# Altium PCB CV2018-DIFF.PcbDoc
Units mil, origin at the board's own origin, x right, y up, seen from the top; angles counter-clockwise.
Board outline 6299 x 3937 mil, 2 copper layers (TopLayer, BottomLayer); 27 components, 51 nets, 206 pads, 33 vias.
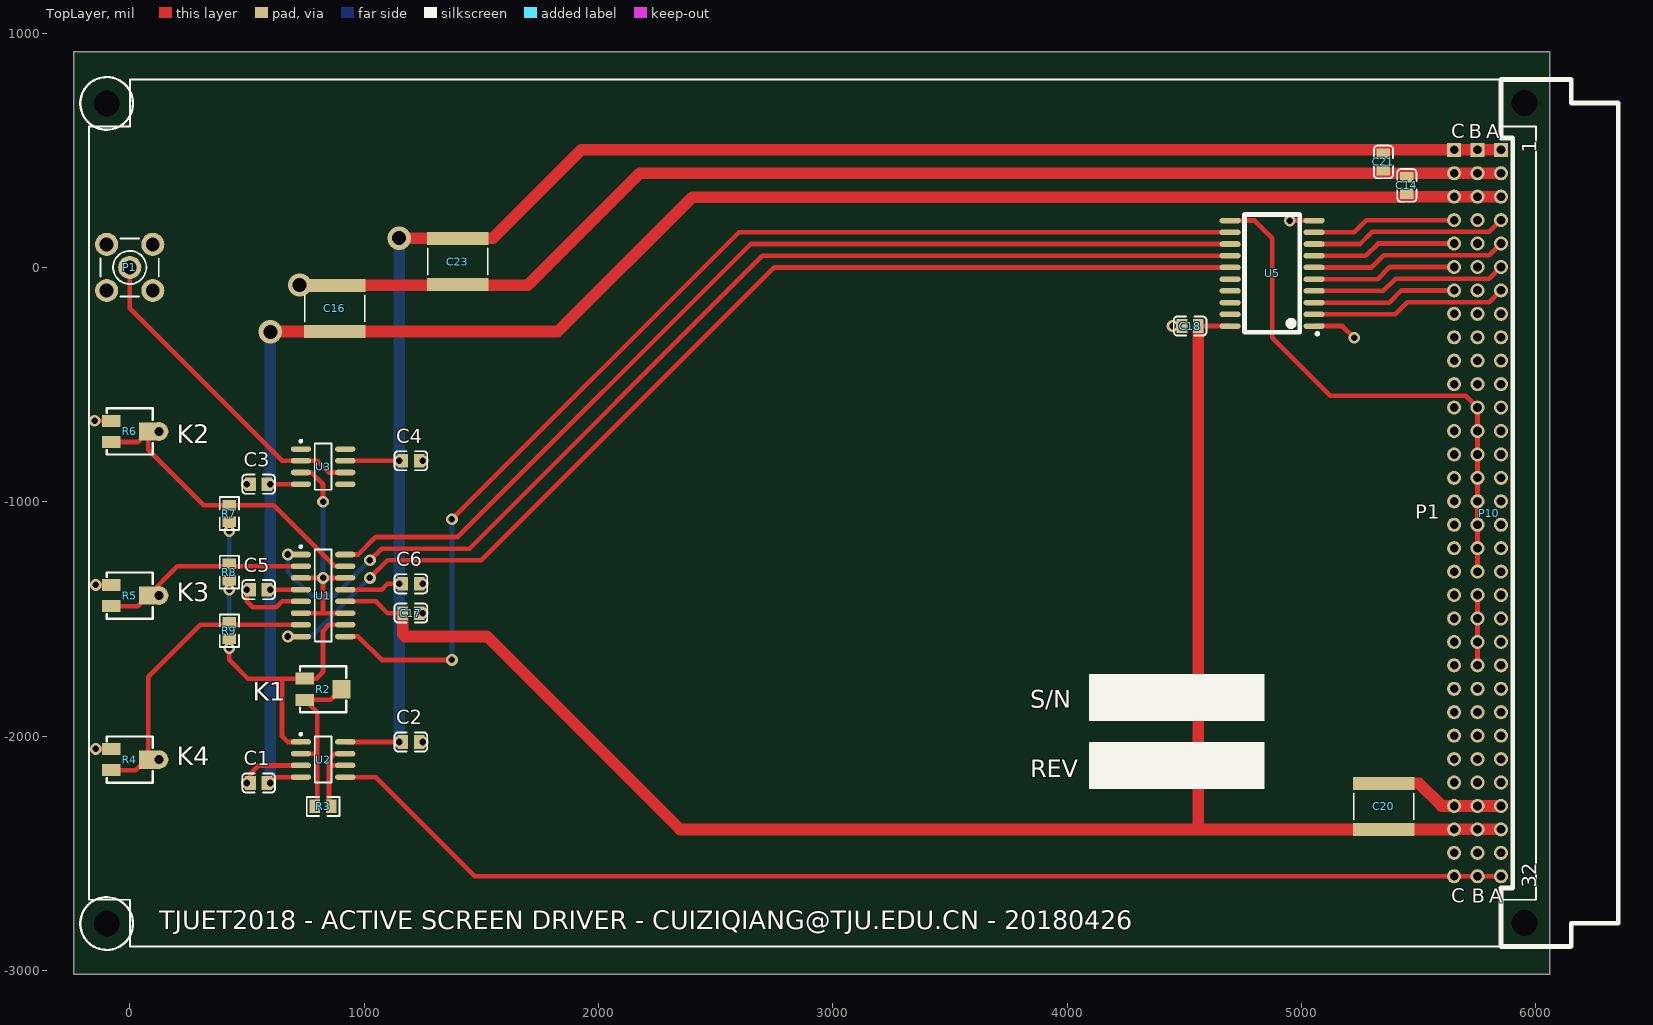
[diagram p0: TopLayer view]
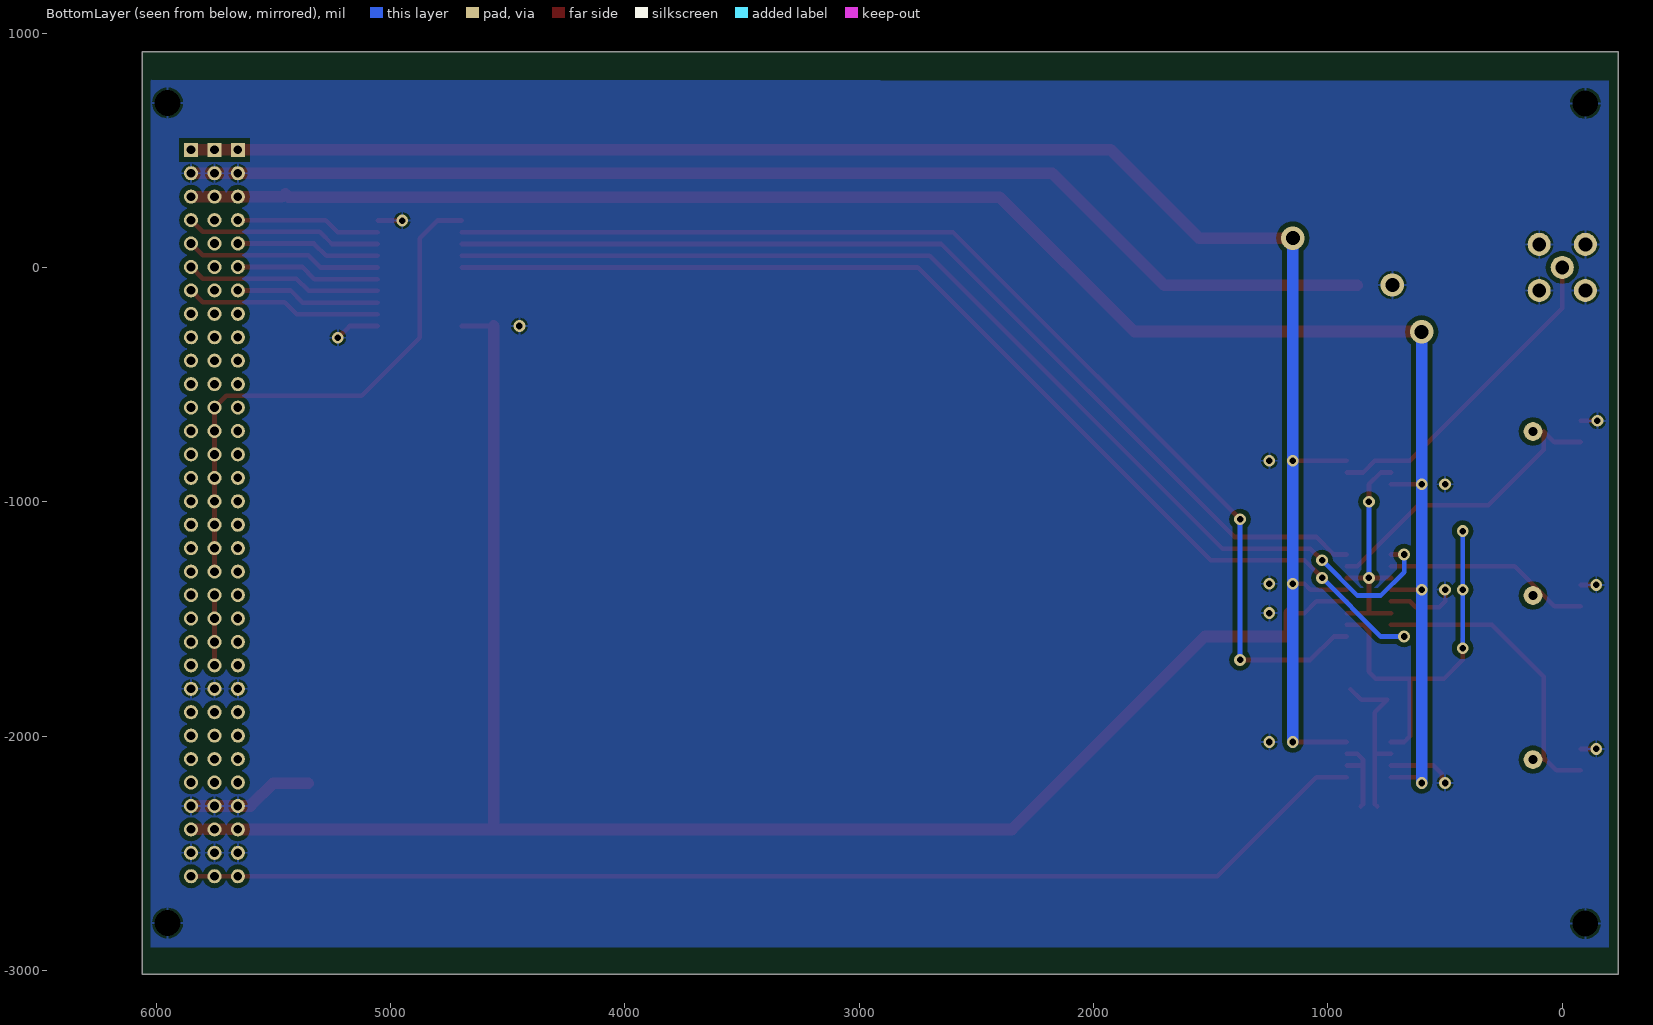
[diagram p1: BottomLayer view, seen from below]
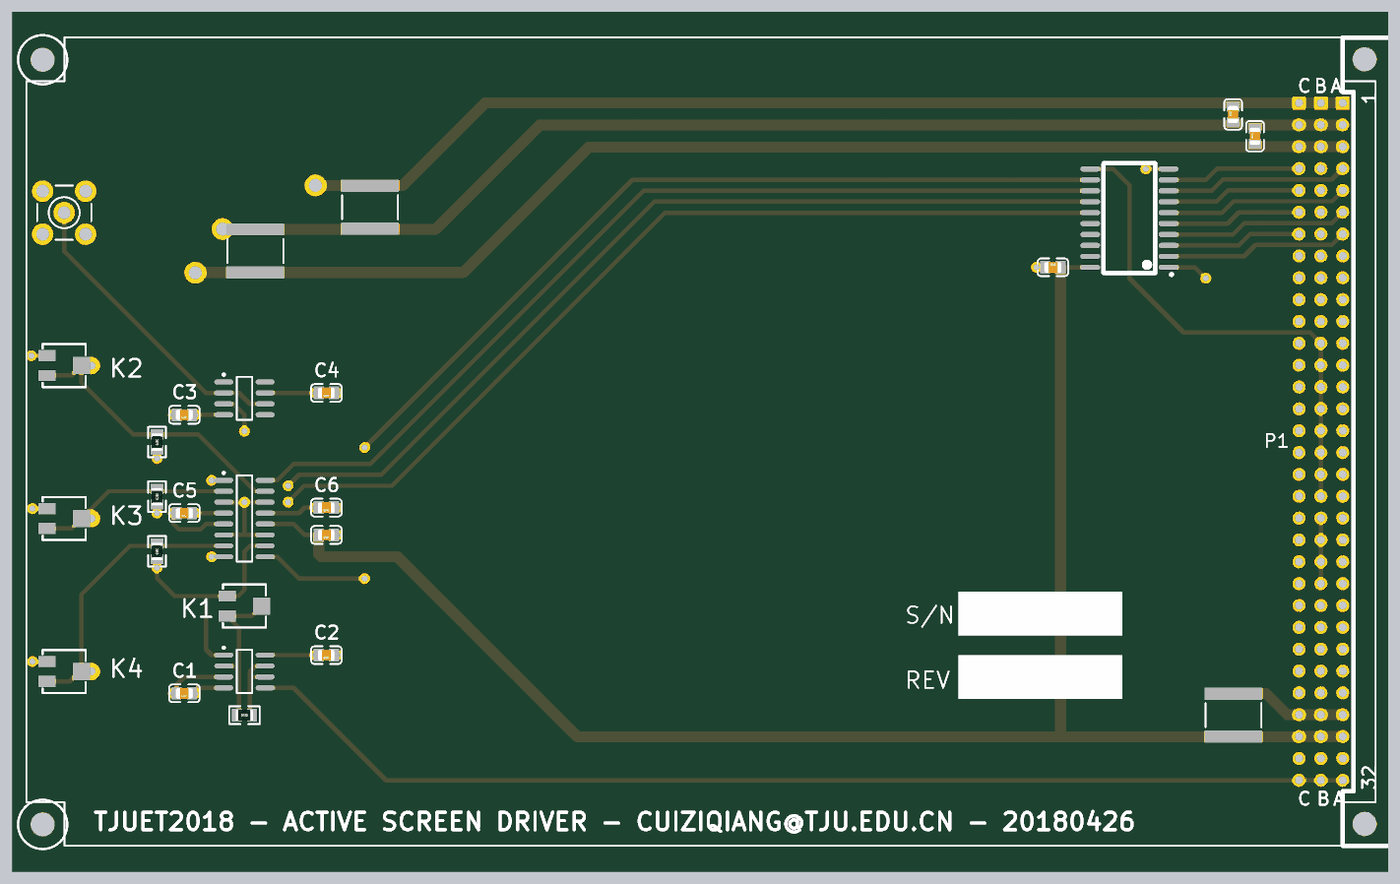
[diagram p2: 3D render of the assembled board from above, using the file's embedded part models]

## Layer stack, top to bottom
TopLayer: signal copper 1.4
Dielectric: core 12.6, FR-4, Dk 4.8
BottomLayer: signal copper 1.4

## Board outline
-238.43,-3017 6060.57,-3017 6060.57,920 -238.43,920

## Design rules (kind name [scope] priority, off if disabled: settings)
Clearance [All] p1: gap=10
FabricationTestPointUsage TestPointUsage [All] p1: valid=0 allowmultiple=FALSE
FabricationTestpoint Testpoint [All] p1: side=3 testpointundercomponent=TRUE minsize=40 maxsize=100 preferedsize=60 minholesize=20 maxholesize=40 preferedholesize=32 testpointgrid=1 allowsidetop=TRUE allowsidebottom=TRUE usegrid=TRUE gridtolerance=0.01
PlaneClearance [All] p1: clearance=10
PolygonConnect [All] p1: connectstyle=Relief reliefconductorwidth=10 reliefentries=4 polygonreliefangle="90 Angle" airgapwidth=10
RoutingVias [All] p1: holewidth=28 width=50 viastyle="Through Hole" minholewidth=28 minwidth=50 maxholewidth=28 maxwidth=50
SilkToSolderMaskClearance SilkscreenOverComponentPads [IsPad] p1: minsilkscreentomaskgap=10 clearancetoexposedcopper=TRUE
SolderMaskExpansion [All] p1: expansion=2
Width [All] p1: maxlimit=100 minlimit=10 preferedwidth=20
24 further rules are at their usual default settings.

## Components (designator, comment, footprint, x,y, rotation, side; value= is the part's Value field where it differs from the comment)
C1 "100nF(104) 10% 50V" LC-0805_C 550,-2200 r180 top
C2 "100nF(104) 10% 50V" LC-0805_C 1200,-2025 r180 top
C3 "100nF(104) 10% 50V" LC-0805_C 550,-925 r180 top
C4 "100nF(104) 10% 50V" LC-0805_C 1200,-825 r180 top
C5 "100nF(104) 10% 50V" LC-0805_C 550,-1375 r180 top
C6 "100nF(104) 10% 50V" LC-0805_C 1200,-1350 r180 top
C14 "100nF(104) 10% 50V" LC-0805_C 5450,350 r90 top
C16 "Cap Pol3" C2225 875,-175 r270 top
C17 "100nF(104) 10% 50V" LC-0805_C 1200,-1475 r180 top
C18 "100nF(104) 10% 50V" LC-0805_C 4525,-250 r0 top
C20 "Cap Pol3" C2225 5351.57,-2300 r90 top
C21 "100nF(104) 10% 50V" LC-0805_C 5350,450 r90 top
C23 "Cap Pol3" C2225 1400,25 r270 top
P1 "SMB" SMB_V-RJ45 0,0 r0 top locked
P10 "CNVME96" CNVME96 5851.57,502 r90 top locked
R2 "2K" POT4MM-2 825,-1800 r0 top
R3 "4.99KΩ (4991) ±1%" LC-0805_R 825,-2300 r0 top
R4 "2K" POT4MM-2 0,-2100 r0 top
R5 "2K" POT4MM-2 0,-1400 r0 top
R6 "2K" POT4MM-2 0,-700 r0 top
R7 "4.99KΩ (4991) ±1%" LC-0805_R 425,-1050 r270 top
R8 "4.99KΩ (4991) ±1%" LC-0805_R 425,-1300 r270 top
R9 "4.99KΩ (4991) ±1%" LC-0805_R 425,-1550 r270 top
U1 "DG412CY" NSO16_N 825,-1400 r0 top
U2 "AD8066ARZ" ADI-R-8_N 825,-2100 r0 top
U3 "AD817ARZ" ADI-R-8_N 825,-850 r0 top
U5 "74HC574D" LC-SOIC-20_300mil 4875,-25 r90 top

## Footprints (in the part's own frame and the unit in brackets; to place one, negate y for a bottom-side part, rotate by r counter-clockwise, add the part's x,y. Pads: shape width x height; smd on the part's side, far side on the other; paste and mask are expansions set on the pad)
ADI-R-8_N [mm] "SOIC, 8-Leads, Body 4.9x3.9mm, Pitch 1.27mm, IPC Medium Density"
  oval 2.2x0.6 smd: 1(-2.4,1.905) 2(-2.4,0.635) 3(-2.4,-0.635) 4(-2.4,-1.905) 5(2.4,-1.905) 6(2.4,-0.635) 7(2.4,0.635) 8(2.4,1.905)
  silkscreen extent -2.52,-2.5 0.9,2.88, body extent -2,-2.5 2,2.5, height 1.75
C2225 [mm] "Chip Capacitor, Body 5.7x6.4mm, IPC High Density"
  rect 1.4x6.7 smd: 1(-2.5,0) 2(2.5,0)
  silkscreen extent -1.4,-3.25 1.4,3.25, body extent -2.95,-3.4 2.95,3.4, height 1.4
CNVME96 [mil]
  round 50 hole 110: 97(200,-100) 98(-3300,-100)
  rect 60x60 / inner round 60 / far side rect 60x60 hole 37: A1(0,0) B1(0,100) C1(0,200)
  round 60 hole 37: A2(-100,0) A3(-200,0) A4(-300,0) A5(-400,0) A6(-500,0) A7(-600,0) A8(-700,0) A9(-800,0) A10(-900,0) A11(-1000,0) A12(-1100,0) A13(-1200,0) A14(-1300,0) A15(-1400,0) A16(-1500,0) A17(-1600,0) A18(-1700,0) A19(-1800,0) A20(-1900,0) A21(-2000,0) A22(-2100,0) A23(-2200,0) A24(-2300,0) A25(-2400,0) A26(-2500,0) A27(-2600,0) A28(-2700,0) A29(-2800,0) A30(-2900,0) A31(-3000,0) A32(-3100,0) B2(-100,100) B3(-200,100) B4(-300,100) B5(-400,100) B6(-500,100) B7(-600,100) B8(-700,100) B9(-800,100) B10(-900,100) B11(-1000,100) B12(-1100,100) B13(-1200,100) B14(-1300,100) B15(-1400,100) B16(-1500,100) B17(-1600,100) B18(-1700,100) B19(-1800,100) B20(-1900,100) B21(-2000,100) B22(-2100,100) B23(-2200,100) B24(-2300,100) B25(-2400,100) B26(-2500,100) B27(-2600,100) B28(-2700,100) B29(-2800,100) B30(-2900,100) B31(-3000,100) B32(-3100,100) C2(-100,200) C3(-200,200) C4(-300,200) C5(-400,200) C6(-500,200) C7(-600,200) C8(-700,200) C9(-800,200) C10(-900,200) C11(-1000,200) C12(-1100,200) C13(-1200,200) C14(-1300,200) C15(-1400,200) C16(-1500,200) C17(-1600,200) C18(-1700,200) C19(-1800,200) C20(-1900,200) C21(-2000,200) C22(-2100,200) C23(-2200,200) C24(-2300,200) C25(-2400,200) C26(-2500,200) C27(-2600,200) C28(-2700,200) C29(-2800,200) C30(-2900,200) C31(-3000,200) C32(-3100,200)
  silkscreen extent -3400,-500 300,0
LC-0805_C [mm]
  rect 1.16x1.47 smd: 1(-0.89,0) 2(0.89,0)
  silkscreen extent -1.77,-1.04 1.77,1.04, body extent -1,-0.62 1,0.63, height 0.77
LC-0805_R [mm]
  rect 1.16x1.47 smd: 1(-0.89,0) 2(0.89,0)
  silkscreen extent -1.77,-1.04 1.77,1.04, body extent -1,-0.62 1,0.63, height 0.49
LC-SOIC-20_300mil [mm]
  oval 0.6x2.3 smd: 1(-5.715,-4.55) 2(-4.445,-4.55) 3(-3.175,-4.55) 4(-1.905,-4.55) 5(-0.635,-4.55) 6(0.635,-4.55) 7(1.905,-4.55) 8(3.175,-4.55) 9(4.445,-4.55) 10(5.715,-4.55) 11(5.715,4.55) 12(4.445,4.55) 13(3.175,4.55) 14(1.905,4.55) 15(0.635,4.55) 16(-0.635,4.55) 17(-1.905,4.55) 18(-3.175,4.55) 19(-4.445,4.55) 20(-5.715,4.55)
  silkscreen extent -6.7,-5.05 6.38,3
NSO16_N [mm] "SOIC, 16-Leads, Body 9.9x3.9mm, Pitch 1.27mm, IPC Medium Density"
  oval 2.2x0.6 smd: 1(-2.4,4.445) 2(-2.4,3.175) 3(-2.4,1.905) 4(-2.4,0.635) 5(-2.4,-0.635) 6(-2.4,-1.905) 7(-2.4,-3.175) 8(-2.4,-4.445) 9(2.4,-4.445) 10(2.4,-3.175) 11(2.4,-1.905) 12(2.4,-0.635) 13(2.4,0.635) 14(2.4,1.905) 15(2.4,3.175) 16(2.4,4.445)
  silkscreen extent -2.52,-5 0.9,5.42, body extent -2,-5 2,5, height 1.75
POT4MM-2 [mm] "Square Trimming Potentiometer"
  rect 2x1.3 smd: CCW(-2,-1.15) CW(-2,1.15)
  rect 2x2 smd: W(2,0)
  silkscreen extent -2.5,-2.5 2.5,2.5
SMB_V-RJ45 [mm] "Connector; SMB Straight"
  round 2.5 hole 1.5: 1(0,0) 2(-2.5,-2.5) 2(-2.5,2.5) 2(2.5,-2.5) 2(2.5,2.5)
  silkscreen extent -3.15,-3.15 3.15,3.15

## Part data
C1 C2 C3 C4 C5 C6 C14 C17 C18 C21: library part "0805 100nF(104) 10% 50V", "贴片电容"
C16 C20 C23: "Polarized Capacitor (Surface Mount)"
P1: "SMB Straight Connector"
P10: "96-Pin Connector (3x32 2.54mm grid)"
R2 R4 R5 R6: library part "RPot SM", "Square Trimming Potentiometer"
R3 R7 R8 R9: library part "0805 4.99KΩ (4991) 1%", "贴片电阻"
U1: "Improved, Quad, SPST Analog Switches"
U2: "Double Channel Low Power Operational Amplifier, 145 MHz BW, 180 V/us SR, Industrial, 8-pin SOIC (R-8), Tube"
U3: "Single Channel Low Power Operational Amplifier, 50 MHz BW, 350 V/us SR, Industrial, 8-pin SOIC (R-8), Tube"
U5: library part 74HC573D, "74系列逻辑芯片"

## Free pads (board coordinates)
  round 80 hole 37: 0(125,-2100) 0(125,-1400) 0(125,-700)
  round 50 hole 110: 1(-98.43,700) 2(-98.43,-2800)

## Via types
v1: diameter 50, hole 28, TopLayer to BottomLayer, 30 vias
v2: diameter 100, hole 60, TopLayer to BottomLayer, 3 vias

## Nets (pads, with @x,y where several pads share a name; then routed paths per layer and width w, separated by ;. In a path a pad name is that pad's centre, name@x,y a point inside that pad or via, vN(x,y) a via of type N, cw(c..) or ccw(c..) an arc to the next point about the centre after c; other vN are vias at no path point)
+5V: C17.2 C18.2 C20.1 P10.A30 P10.B30 P10.C30 U1.12 U5.20 | length 7657.5
  TopLayer w20: U1.12 1050,-1425 1100,-1475 C17.2 ; C18.2 U5.20 ; P10.C30@5651.15,-2398.43 P10.C30
  TopLayer w50: C17.2 1164.96,-1564.96 1175,-1575 1525,-1575 2348.43,-2398.43 C20.1 P10.C30@5651.15,-2398.43 ; 4560.04,-2383.46 C18.2 ; P10.C30 P10.B30 P10.A30
+12V: C2.2 C4.2 C6.2 C21.2 C23.1 P10.A1 P10.B1 P10.C1 U1.13 U2.8 U3.7 | length 7754.5
  TopLayer w20: U2.8 C2.2 ; U1.13 1075,-1375 1100,-1350 C6.2 ; U3.7 C4.2
  TopLayer w50: v2(1150,125) 1550,125 1927,502 P10.C1 P10.B1 P10.A1
  BottomLayer w50: v1(1150,-2025) v2(1150,125)
  other v1: 1150,-1350 1150,-825
-12V: C1.1 C3.1 C5.1 C14.1 C16.2 P10.A3 P10.B3 P10.C3 U1.4 U2.4 U3.4 | length 7854.8
  TopLayer w20: C1.1 610.04,-2175 U2.4 ; C5.1 U1.4 ; C3.1 U3.4
  TopLayer w50: v2(600,-275) 601.57,-273.43 C16.2 1826.57,-273.43 2400,300 5435.04,300 C14.1 ; C14.1@5462.96,302 P10.C3 P10.B3 P10.A3
  BottomLayer w50: v1(600,-2200) v2(600,-275)
  other v1: 600,-1375 600,-925
A0: P10.C12
A1: P10.A12
A2: P10.C13
A3: P10.A13
A4: P10.C14
A5: P10.A14
A6: P10.C15
A7: P10.A15
A8: P10.C16
A9: P10.A16
A10: P10.C17
A11: P10.A17
A12: P10.C18
A13: P10.A18
A14: P10.C19
A15: P10.A19
AGND: C1.2 C2.1 C3.2 C4.1 C5.2 C6.1 C14.2 C16.1 C17.1 C18.1 C20.2 C21.1 C23.2 P1.2 P10.97 P10.98 P10.A2 P10.A24 P10.A29 P10.A31 P10.B2 P10.B24 P10.B29 P10.B31 P10.C2 P10.C24 P10.C29 P10.C31 pad.1 pad.2 R4.CW R5.CW R6.CW U1.5 U2.3 U5.1 U5.10 | length 6786
  TopLayer w20: v1(-150,-654.72) R6.CW ; v1(-145.28,-2054.72) R4.CW ; v1(-145.28,-1354.72) R5.CW ; v1(500,-1375) 500,-1425 525,-1450 625,-1450 650,-1425 U1.5 ; C1.2 514.96,-2160.04 550,-2125 U2.3 ; v1(4950,200) U5.10 ; U5.1 5175,-250 v1(5225,-300)
  TopLayer w50: C16.1 1698.43,-76.57 2177,402 P10.C2 P10.B2 P10.A2 ; C20.2 5501.58,-2201.58 5598,-2298 P10.C29 P10.B29 P10.A29
  other v1: 500,-2200 1250,-2025 1250,-1475 1250,-1350 500,-925 1250,-825 4450,-250
  other v2: 725,-75
CLK: P10.B12 P10.B13 P10.B14 P10.B15 P10.B16 P10.B17 P10.B18 P10.B19 U5.11 | length 2335.2
  TopLayer w20: U5.11 4800,200 4875,125 4875,-300 5123,-548 5701.57,-548 P10.B12 P10.B13 P10.B14 P10.B15 P10.B16 P10.B17 P10.B18 P10.B19
D0: P10.C4 U5.9 | length 619
  TopLayer w20: U5.9 5225,150 5277,202 P10.C4
D1: P10.A4 U5.8 | length 839.7
  TopLayer w20: U5.8 5250,100 5302,152 5801.57,152 P10.A4
D2: P10.C5 U5.7 | length 619
  TopLayer w20: U5.7 5275,50 5327,102 P10.C5
D3: P10.A5 U5.6 | length 839.7
  TopLayer w20: U5.6 5300,0 5352,52 5801.57,52 P10.A5
D4: P10.C6 U5.5 | length 619
  TopLayer w20: U5.5 5325,-50 5377,2 P10.C6
D5: P10.A6 U5.4 | length 839.7
  TopLayer w20: U5.4 5350,-100 5402,-48 5801.57,-48 P10.A6
D6: P10.C7 U5.3 | length 619
  TopLayer w20: U5.3 5375,-150 5427,-98 P10.C7
D7: P10.A7 U5.2 | length 839.7
  TopLayer w20: U5.2 5400,-200 5452,-148 5801.57,-148 P10.A7
D8: P10.C8
D9: P10.A8
D10: P10.C9
D11: P10.A9
D12: P10.C10
D13: P10.A10
D14: P10.C11
D15: P10.A11
ELE: P1.1 U3.2 U3.6 | length 1384.4
  TopLayer w20: P1.1 0,-175 650,-825 U3.2 800,-825 850,-875 U3.6
NetP10_B20: P10.B20 P10.B21 P10.B22 P10.B23 | length 300
  TopLayer w20: P10.B23 P10.B22 P10.B21 P10.B20
NetR2_CCW: R2.CCW R2.W R3.1 U2.2 | length 726.9
  TopLayer w20: U2.2 800,-2075 ; R3.1 800,-2289.96 800,-1899.02 R2.CCW 858.46,-1845.28 R2.W
NetR2_CW: R2.CW R7.2 R8.2 R9.2 U1.10 U2.1 | length 1651.3
  TopLayer w20: R9.2 v1(425,-1625) 425,-1675 504.72,-1754.72 650,-1754.72 ; U2.1 675,-2025 650,-2000 650,-1754.72 ; U1.10 850,-1525 825,-1550 825,-1725 795.28,-1754.72 R2.CW 650,-1754.72
  BottomLayer w20: v1(425,-1625) v1(425,-1125)
  other v1: 425,-1375
NetR3_2: R3.2 U2.6 U2.7 | length 347.3
  TopLayer w20: 856.18,-2125 U2.6 ; R3.2 850,-2289.96 850,-2100 856.18,-2093.82 875,-2075 U2.7
NetR4_CCW: pad.0@125,-2100 R4.CCW R4.W R9.1 U1.7 | length 1271.2
  TopLayer w20: R4.CCW 25.98,-2145.28 R4.W@75,-2096.26 ; R4.W 78.74,-1746.26 300,-1525 U1.7
NetR5_CCW: pad.0@125,-1400 R5.CCW R5.W R8.1 U1.2 | length 879.8
  TopLayer w20: R5.CCW 33.46,-1445.28 R5.W 203.74,-1275 U1.2
NetR6_CCW: pad.0@125,-700 R6.CCW R6.W R7.1 U1.15 | length 1301.3
  TopLayer w20: R6.CCW 33.46,-745.28 R6.W 78.74,-778.74 314.96,-1014.96 614.96,-1014.96 875,-1275 U1.15
NetU1_3: U1.3 U1.6 U1.11 U1.14 U3.3 | length 1043.2
  TopLayer w20: U1.6 825,-1475 ; U1.3 v1(825,-1325) ; U3.3 775,-875 825,-925 v1(825,-1000) ; U1.11 825,-1475 ; U1.14 v1(825,-1325) ; 825,-1475 v1(825,-1325)
  BottomLayer w20: v1(825,-1325) v1(825,-1000)
SWA0: U1.9 U5.12 | length 4925.2
  TopLayer w20: U1.9 975,-1575 1075,-1675 v1(1375,-1675) ; v1(1375,-1075) 2600,150 U5.12
  BottomLayer w20: v1(1375,-1675) v1(1375,-1075)
SWA1: U1.16 U5.13 | length 4325.2
  TopLayer w20: U1.16 975,-1225 1050,-1150 1400,-1150 2650,100 U5.13
SWA2: U1.1 U5.14 | length 4793.4
  TopLayer w20: v1(675,-1225) U1.1 ; v1(1025,-1250) 1075,-1200 1450,-1200 2700,50 U5.14
  BottomLayer w20: v1(675,-1225) 675,-1300 775,-1400 875,-1400 v1(1025,-1250)
SWA3: U1.8 U5.15 | length 4728.8
  TopLayer w20: v1(675,-1575) U1.8 ; v1(1025,-1325) 1100,-1250 1500,-1250 2750,0 U5.15
  BottomLayer w20: v1(675,-1575) 775,-1575 v1(1025,-1325)
VE: P10.A32 P10.B32 P10.C32 U2.5 | length 5107.3
  TopLayer w20: U2.5 1050,-2175 1473,-2598 P10.C32 P10.B32 P10.A32
pads on no net: P10.A20 P10.A21 P10.A22 P10.A23 P10.A25 P10.A26 P10.A27 P10.A28 P10.B4 P10.B5 P10.B6 P10.B7 P10.B8 P10.B9 P10.B10 P10.B11 P10.B25 P10.B26 P10.B27 P10.B28 P10.C20 P10.C21 P10.C22 P10.C23 P10.C25 P10.C26 P10.C27 P10.C28 U3.1 U3.5 U3.8 U5.16 U5.17 U5.18 U5.19

## Polygon pours and split planes (outlines as drawn)
AGND on BottomLayer "GND" (solid, remove dead copper, pour order 3): -200,797.89 -198.38,796.22 -198.38,-2900 6023.38,-2900 6023.38,798.34 6025,800

## Other copper
TopLayer:
  text ".GTL" at 5760.57,1070 h90
BottomLayer:
  text "P/N XXXXXX-XXX REV A" at 1081.57,1120 h75
  text ".GBL" at 5760.57,1070 h90

## Silkscreen, mask and mechanical layers (free items; w line width, h text height)
TopOverlay:
  circle w10: c-98.43,-2800 r112.5
  circle w10: c-98.43,700 r112.5
  rectangle: 4092.57,-1935.43 4842.57,-1735.43
  rectangle: 4092.57,-2225.43 4842.57,-2025.43
  lines w8: -173.43,-2698 -173.43,602 1.57,602 1.57,802 5851.57,802 5851.57,602 6001.57,602 6001.57,-2698 5851.57,-2698 5851.57,-2898 1.57,-2898 1.57,-2698 -173.43,-2698
  lines w10: 1154.17,1715.97 ccw(c1202.57,1755.5) 1154.28,1715.83
  text "C" at 1257.57,1718 h60
  text "2002 COMPANY NAME" at 1407.57,1718 h75
  text "BOARD NAME" at 1257.57,1543 h75
  text "ASSY NO.: XXXXXX" at 1257.57,1393 h75
  text ".GTO" at 5760.57,1070 h90
  text "K2" at 200,-750 h80
  text "P1" at 5484.9,-1073 h60
  text "K3" at 200,-1425 h80
  text "K1" at 525,-1850 h80
  text "S/N" at 3842.57,-1877.93 h75
  text "K4" at 200,-2125 h80
  text "REV" at 3842.57,-2175.43 h75
  text "TJUET2018 - ACTIVE SCREEN DRIVER - CUIZIQIANG@TJU.EDU.CN - 20180426" at 126.57,-2825 h80
TopPaste:
  text ".GTP" at 5760.57,1070 h90
BottomPaste:
  text ".GBP" at 5760.57,1070 h90
TopSolder:
  text ".GTS" at 5760.57,1070 h90
BottomSolder:
  text ".GBS" at 5760.57,1070 h90
Mechanical1:
  the board outline again, w20
Mechanical4:
  text ".Pcb_File_Name_No_Path" at 3860.57,1260 h90
  text ".Printout_Name" at 3860.57,1070 h90
DrillDrawing:
  text ".LEGEND" at 6576.57,-2828 h90

## Dimensions
-98.43,-3037 to -238.43,-3017 on Mechanical4
-258.43,-2800 to -238.43,-3017 on Mechanical4

## Text inside footprints (layer, text, board x,y; h text height)
P10: TopOverlay "C" at 5639.07,552 h60; TopOverlay "B" at 5714.07,552 h60; TopOverlay "A" at 5789.07,552 h60; TopOverlay "C" at 5639.07,-2710.5 h60; TopOverlay "B" at 5726.57,-2710.5 h60; TopOverlay "A" at 5801.57,-2710.5 h60; TopOverlay "32" at 6001.57,-2648 h60 r90; TopOverlay "1" at 6001.57,489.5 h60 r90